# EAGLE board lightclock.0 (EAGLE 6.2)
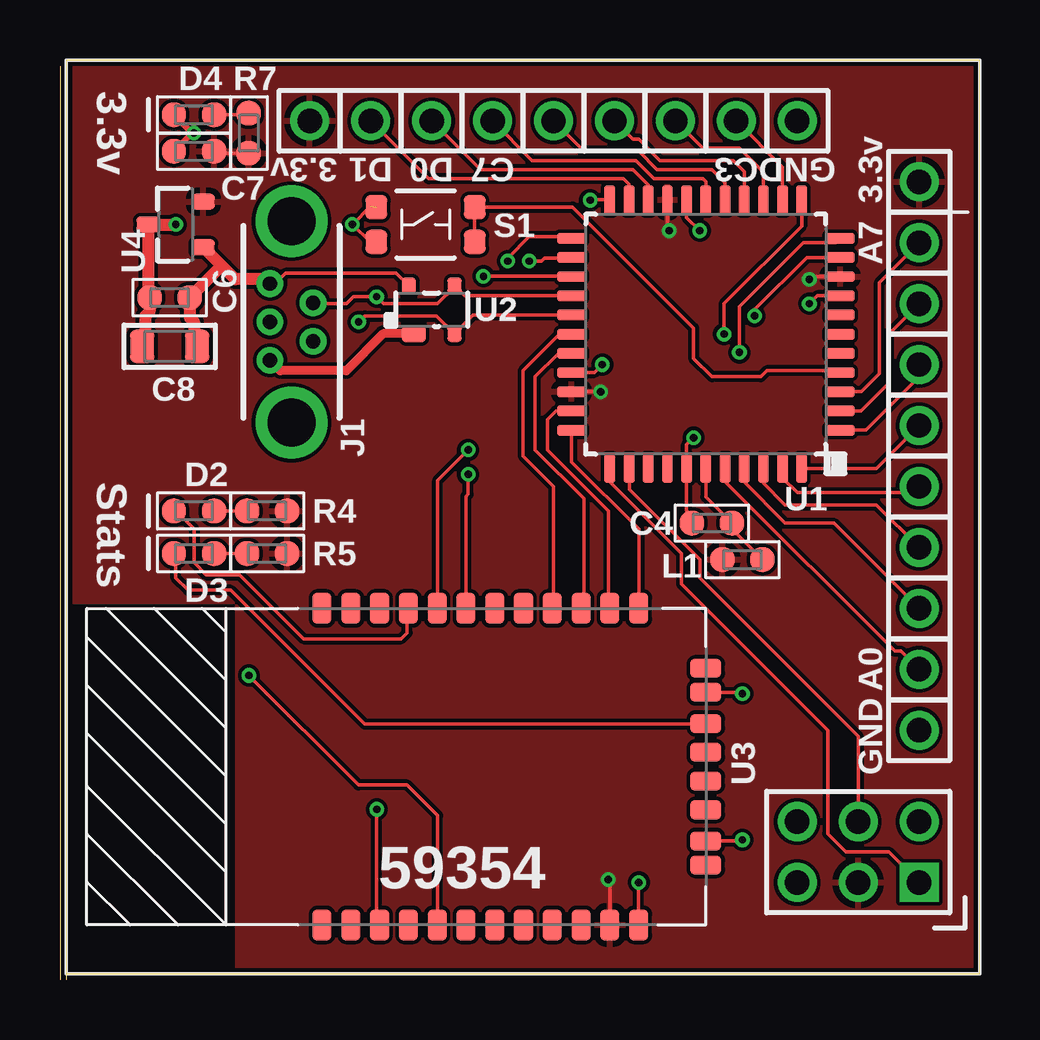
[diagram p0: board, top side]
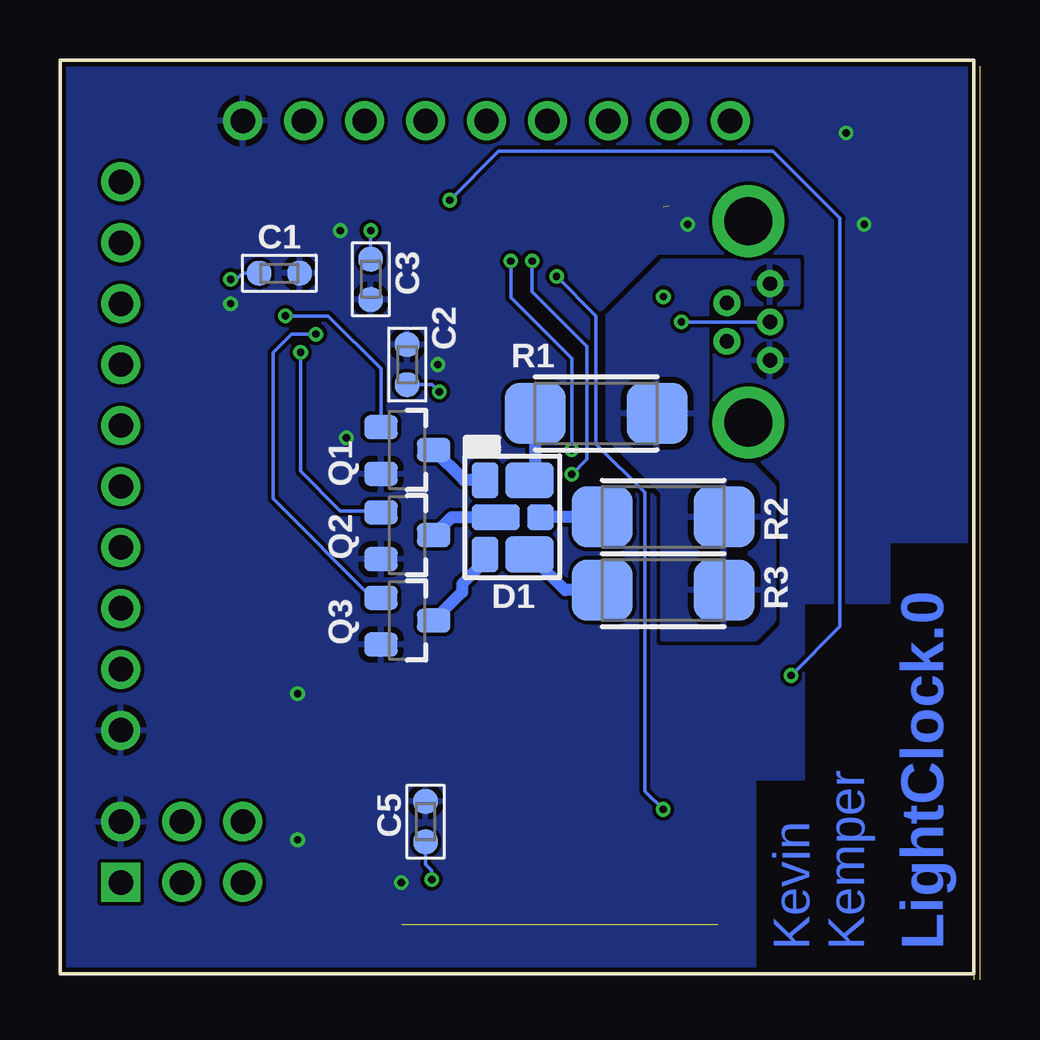
[diagram p1: board, bottom side, seen from below]

Size 38.35 x 38.35 mm. Coordinates in mm from the lower left corner, seen from the top.
Outline: 0.25,0.25 38.35,0.25 38.35,38.35 0.25,38.35 0.25,0.25
Outline: 0,38.1 0,0
Outline: 0.25,0.25 0.25,0
Copper layers (1*16): Top 0.035mm / dielectric 1.5mm / Bottom 0.035mm
Design rules: minimum track width 6mil, minimum drill 12mil, track to track 6mil, track to pad 6mil, pad to pad 6mil, via to via 6mil, smd to smd 0mil, copper to edge 10mil, drill to drill 10mil, minimum pad ring 10mil, minimum via ring 6mil, stop-mask expansion 2mil, vias tented up to drill 100mil, thermal gap 10mil

## Footprints (pad centres in the part's own frame; a part is rotated, then mirrored left to right if it is on the bottom)
0603 = smd 1.016 x 1.016: 1 0,0.838; 2 0,-0.838
0805 = smd 1.016 x 1.397: 1 -1.143,0; 2 1.143,0
LRTDC9TP-EAFB-GHQN = smd 2 x 1.5: A1 -0.524,-1.536; A3 -0.524,1.564 | smd 1.1 x 1.1: A2 -0.974,0.014 | smd 1.1 x 1.5: C1 1.326,-1.536; C3 1.326,1.564 | smd 2 x 1.1: C2 0.876,0.014
0603-POL = smd 1.016 x 1.016: 1 0,0.838; 2 0,-0.838
651005136421 = drill 0.6 pad 1.016: 1 0.9,-1.6; 2 -0.9,-0.8; 3 0.9,0; 4 -0.9,0.8; 5 0.9,1.6 | drill 2: 6 0,4.2; 7 0,-4.2
HEADER-1X1 = drill 1.016 pad 1.626: 1 0,0
HEADER-2X6 = drill 1.016 pad 1.626 square: 1 0,0 | drill 1.016 pad 1.626: 2 2.54,0; 3 5.08,0; 4 5.08,-2.54; 5 2.54,-2.54; 6 0,-2.54
SOT-23 = smd 1 x 1.4: 1 -0.95,-1.1; 2 1,-1.1; 3 0,1.1
2010 = smd 2.54 x 2.54: 1 -2.54,0; 2 2.54,0
KMR211GLFS = smd 0.9 x 1: 1 -2.05,-0.725; 2 -2.05,0.725; 3 2.05,-0.725; 4 2.05,0.725
ATXMEGA16A4U-AUR = smd 1.2 x 0.45: 1 -5.6,4; 2 -5.6,3.2; 3 -5.6,2.4; 4 -5.6,1.6; 5 -5.6,0.8; 6 -5.6,0; 7 -5.6,-0.8; 8 -5.6,-1.6; 9 -5.6,-2.4; 10 -5.6,-3.2; 11 -5.6,-4; 23 5.6,-4; 24 5.6,-3.2; 25 5.6,-2.4; 26 5.6,-1.6; 27 5.6,-0.8; 28 5.6,0; 29 5.6,0.8; 30 5.6,1.6; 31 5.6,2.4; 32 5.6,3.2; 33 5.6,4 | smd 0.45 x 1.2: 12 -4,-5.6; 13 -3.2,-5.6; 14 -2.4,-5.6; 15 -1.6,-5.6; 16 -0.8,-5.6; 17 0,-5.6; 18 0.8,-5.6; 19 1.6,-5.6; 20 2.4,-5.6; 21 3.2,-5.6; 22 4,-5.6; 34 4,5.6; 35 3.2,5.6; 36 2.4,5.6; 37 1.6,5.6; 38 0.8,5.6; 39 0,5.6; 40 -0.8,5.6; 41 -1.6,5.6; 42 -2.4,5.6; 43 -3.2,5.6; 44 -4,5.6
PRTR5V0U2X = smd 1 x 0.7: 1 -0.75,-1 | smd 0.6 x 0.7: 2 0.95,-1; 3 0.95,1; 4 -0.95,1
RN-42 = smd 1.3 x 0.8: 1 -13.2,16; 2 -13.2,14.8; 3 -13.2,13.6; 4 -13.2,12.4; 5 -13.2,11.2; 6 -13.2,10; 7 -13.2,8.8; 8 -13.2,7.6; 9 -13.2,6.4; 10 -13.2,5.2; 11 -13.2,4; 12 -13.2,2.8; 13 0,2.8; 14 0,4; 15 0,5.2; 16 0,6.4; 17 0,7.6; 18 0,8.8; 19 0,10; 20 0,11.2; 21 0,12.4; 22 0,13.6; 23 0,14.8; 24 0,16 | smd 0.8 x 1.3: 28 -3.5,0; 29 -9.7,0; 30 -2.5,0; 31 -4.8,0; 32 -6,0; 33 -7.2,0; 34 -8.4,0; 35 -10.7,0
AP7313-33SAG-7 = smd 0.65 x 0.95: 1 -0.95,-1.15; 2 0.95,-1.15; 3 0,1.15

## Placement (x,y rotation side)
C1  0.1 uF  [0603]  29.21,29.46 90 bottom
C2  0.1 uF  [0603]  23.88,25.65 180 bottom
C3  0.1 uF  [0603]  25.4,29.21 0 bottom
C4  0.1 uF  [0603]  27.18,19.05 270 top
C5  0.1 uF  [0603]  23.11,6.6 180 bottom
C6  1 uF  [0603]  4.57,28.45 270 top
C7  1 uF  [0603]  5.59,34.54 270 top
C8  10 uF  [0805]  4.57,26.42 180 top
D1  LED-LRTDC9TP  [LRTDC9TP-EAFB-GHQN]  19.3,19.3 180 bottom
D2  LED  [0603-POL]  5.59,19.56 270 top
D3  LED  [0603-POL]  5.59,17.78 270 top
D4  LED  [0603-POL]  5.59,36.07 270 top
J1  USB-MINI-651005136421  [651005136421]  9.65,27.43 180 top
J2  TESTPAD  [HEADER-1X1]  28.19,35.81 0 top
J3  TESTPAD  [HEADER-1X1]  25.65,35.81 0 top
J4  TESTPAD  [HEADER-1X1]  23.11,35.81 0 top
J5  TESTPAD  [HEADER-1X1]  20.57,35.81 0 top
J6  TESTPAD  [HEADER-1X1]  18.03,35.81 0 top
J7  TESTPAD  [HEADER-1X1]  15.49,35.81 0 top
J8  TESTPAD  [HEADER-1X1]  12.95,35.81 0 top
J9  HEADER-2X6  [HEADER-2X6]  35.81,4.06 180 top
J10  TESTPAD  [HEADER-1X1]  35.81,12.95 0 top
J11  TESTPAD  [HEADER-1X1]  35.81,15.49 0 top
J12  TESTPAD  [HEADER-1X1]  35.81,18.03 0 top
J13  TESTPAD  [HEADER-1X1]  35.81,20.57 0 top
J14  TESTPAD  [HEADER-1X1]  35.81,23.11 0 top
J15  TESTPAD  [HEADER-1X1]  35.81,25.65 0 top
J16  TESTPAD  [HEADER-1X1]  35.81,28.19 0 top
J17  TESTPAD  [HEADER-1X1]  35.81,30.73 0 top
J18  TESTPAD  [HEADER-1X1]  35.81,33.27 0 top
J19  TESTPAD  [HEADER-1X1]  30.73,35.81 0 top
J20  TESTPAD  [HEADER-1X1]  10.41,35.81 0 top
J21  TESTPAD  [HEADER-1X1]  35.81,10.41 0 top
L1  [0603]  28.45,17.53 90 top
Q1  BSS138  [SOT-23]  23.88,22.1 270 bottom
Q2  BSS138  [SOT-23]  23.88,18.54 270 bottom
Q3  BSS138  [SOT-23]  23.88,14.99 270 bottom
R1  18  [2010]  16,23.62 0 bottom
R2  9R1  [2010]  13.21,19.3 0 bottom
R3  13  [2010]  13.21,16.26 0 bottom
R4  750  [0603]  8.64,19.56 90 top
R5  750  [0603]  8.64,17.78 90 top
R7  750  [0603]  7.87,35.31 0 top
S1  KMR211GLFS  [KMR211GLFS]  15.24,31.5 0 top
U1  ATXMEGA-A4U  [ATXMEGA16A4U-AUR]  26.92,26.92 180 top
U2  DIODE-ESD-PRTR5V0U2X  [PRTR5V0U2X]  15.49,27.94 0 top
U3  RN-42  [RN-42]  26.92,15.49 90 top
U4  AP7313-33SAG-7  [AP7313-33SAG-7]  4.83,31.5 90 top

## Library data of the parts
C1-C8 D2-D4 L1 Q1-Q3 R1-R5 R7 = Kemper-Passives
D1 = Kemper-Passives; DIGIKEY: 475-2856-1-ND
J1 = Kemper-Connectors; DIGIKEY: 732-2735-ND
J2-J21 = Kemper-Connectors
S1 = Kemper-ElectroMechanical
U1 = Kemper-DigitalIC; DIGIKEY: ATXMEGA16A4U-AURCT-ND
U2 = Kemper-Passives; DIGIKEY: 568-4140-1-ND
U3 = Kemper-DigitalIC; SPARKFUN: WRL-10253
U4 = Kemper-DigitalIC

## Nets
+3V3: C1.1 C2.1 C3.1 C5.1 C7.1 J9.2 J18.1 J20.1 L1.1 R4.2 R5.2 R7.2 U1.9 U1.19 U1.31 U3.11 U4.2
+5V: C6.1 C8.1 J1.1 R1.2 R2.2 R3.2 U2.4 U4.1
BT_AUTO_DISC: U1.24 U3.20
BT_AUTO_MASTER: U1.25 U3.3
BT_CTS: U1.28 U3.16
BT_RESET: U1.22 U3.5
BT_RTS: U1.29 U3.15
BT_RX: U1.33 U3.13
BT_STATUS: U1.23 U3.19
BT_STATUS_LED: D2.2 U3.21
BT_TX: U1.32 U3.14
BT_TX/RX_STATUS_LED: D3.2 U3.31
D+: J1.3 U1.27 U2.2
D-: J1.2 U1.26 U2.3
GND: C1.2 C2.2 C3.2 C4.2 C5.2 C6.2 C7.2 C8.2 D4.2 J1.5 J9.6 J19.1 J21.1 Q1.2 Q2.2 Q3.2 S1.1 S1.2 U1.8 U1.18 U1.30 U1.38 U2.1 U3.1 U3.4 U3.12 U3.28 U3.29 U4.3
N$1: C4.1 L1.2 U1.39
N$2: D2.1 R4.1
N$3: D1.A1 R1.1
N$4: D1.A2 R2.1
N$5: D1.A3 R3.1
N$6: D3.1 R5.1
N$7: D1.C1 Q1.3
N$8: D1.C2 Q2.3
N$9: D1.C3 Q3.3
N$10: D4.1 R7.1
N$11: J7.1 U1.20
N$13: J8.1 U1.21
N$14: J6.1 U1.17
N$15: J5.1 U1.16
N$16: J4.1 U1.15
N$17: J3.1 U1.14
N$18: J2.1 U1.13
N$20: J10.1 U1.40
N$21: J11.1 U1.41
N$22: J12.1 U1.42
N$23: J13.1 U1.43
N$24: J14.1 U1.44
N$25: J15.1 U1.1
N$26: J16.1 U1.2
N$27: J17.1 U1.3
PDI_CLK: J9.5 U1.35
PDI_DATA: J9.1 U1.34
PWM_B: Q3.1 U1.12
PWM_G: Q2.1 U1.11
PWM_R: Q1.1 U1.10
SWITCH: S1.3 S1.4 U1.4

## Tracks (layer width: path | path; a pad name or v marks a point on that pad's centre or on a via)
+3V3  (via drill 0.3)
  Top 0.152: U1.31 v22.54,24.52 | C7.1 6.5,34.47 R7.2 | v31.24,29.21 31.36,29.32 U1.9 | v25.4,31.24 25.32,31.32 U1.19 | v22.86,4.19 22.92,4.13 U3.11
  Bottom 0.152: C2.1 22.83,24.82 v22.54,24.52 | C1.1 30.73,29.46 30.99,29.21 v31.24,29.21 | C3.1 v25.4,31.24 | C5.1 23.11,4.83 22.86,4.57 v22.86,4.19
  pour Top (rank 2): 0.51,38.1 38.1,38.1 38.1,0.51 7.37,0.51 7.37,15.75 0.51,15.75
+5V
  Top 0.152: U2.4 14.02,29.46 9.4,29.46 8.97,29.03 J1.1
  Top 0.508: C8.1 5.59,26.54 5.59,27.43 5.41,27.61 C6.1 6.65,29.69 6.83,29.69 | J1.1 8.57,29.21 7.31,29.21 6.83,29.69 | U4.1 6.83,29.69
  pour Bottom: 7.62,29.97 7.62,28.19 11.43,28.19 11.43,23.37 8.64,20.57 8.64,14.99 9.4,14.22 13.21,14.22 13.21,20.32 15.49,22.61 15.49,27.69 13.21,29.97
BT_AUTO_DISC  (via drill 0.3)
  Top 0.152: U3.20 15.75,15.52 15.75,20.83 v17.02,22.1 | U1.24 21.17,29.97 21.05,30.1 20.19,30.1 20.07,29.97 v19.56,29.97
  Bottom 0.152: v17.02,22.1 17.02,25.91 19.56,28.45 v19.56,29.97
BT_AUTO_MASTER  (via drill 0.3)
  Top 0.152: U3.3 13.21,2.41 v13.21,7.11 | U1.25 21.31,29.34 v17.65,29.34
  Bottom 0.152: v13.21,7.11 13.97,7.87 13.97,20.32 16,22.35 16,27.69 v17.65,29.34
BT_CTS
  Top 0.152: U1.28 20.83,26.92 19.3,25.4 19.3,21.84 20.57,20.57 20.57,15.54 U3.16
BT_RESET  (via drill 0.3)
  Top 0.152: U3.5 15.75,2.32 15.75,6.86 14.48,8.13 12.45,8.13 v7.87,12.7 | U1.22 22.11,32.52 v22.1,32.51
  Bottom 0.152: v7.87,12.7 5.84,14.73 5.84,31.75 8.64,34.54 20.07,34.54 v22.1,32.51
BT_RTS
  Top 0.152: U1.29 20.79,26.12 19.81,25.15 19.81,22.1 21.84,20.07 21.84,15.61 U3.15
BT_RX
  Top 0.152: U1.33 21.32,21.6 24.13,18.8 U3.13
BT_STATUS  (via drill 0.3)
  Top 0.152: U3.19 16.92,20.16 17.02,20.25 v17.02,21.08 | U1.23 21.26,30.99 19.56,30.99 18.67,30.1 v18.67,29.97
  Bottom 0.152: v17.02,21.08 16.38,21.72 16.38,26.42 18.67,28.7 v18.67,29.97
BT_STATUS_LED
  Top 0.152: D2.2 4.83,19.56 5.59,18.8 5.59,17.4 6.1,16.89 7.49,16.89 10.16,14.22 14.22,14.22 14.48,14.48 14.48,15.45 U3.21
BT_TX
  Top 0.152: U1.32 20.68,23.72 20.32,23.37 20.32,22.1 22.86,19.56 22.86,15.56 U3.14
BT_TX/RX_STATUS_LED
  Top 0.152: 4.83,17.78 D3.2 4.83,17.7 4.83,16.76 5.33,16.26 7.11,16.26 12.7,10.67 26.9,10.67 U3.31
D+  (via drill 0.3)
  Top 0.152: v12.45,27.43 12.7,27.69 15.7,27.69 U2.2 17.23,27.72 U1.27
  Bottom 0.152: J1.3 v12.45,27.43
D-  (via drill 0.3)
  Top 0.152: U1.26 16.86,28.52 U2.3 16.44,28.89 15.75,28.19 13.49,28.19 v13.2,28.49 12.23,28.49 11.94,28.19 10.59,28.19 J1.2
GND  (via drill 0.3)  (3 unrouted)
  Top 0.152: C4.2 26.12,19.6 U1.38 26.12,22.31 v26.42,22.61 | U1.30 22.28,25.32 v22.61,25.65 | U1.8 31.57,28.52 v31.24,28.19 | U3.28 28.39,11.99 v28.45,11.94 | U3.12 v24.12,4.06 v24.13,4.06 | U3.29 28.4,5.79 v28.45,5.84 | 13.48,32.26 12.95,32.26 v12.19,31.5 12.92,30.77 S1.1 | U1.18 26.12,31.79 v26.67,31.24
  Top 0.254: C7.2 5.51,35.31 | D4.2 5.51,35.31 | 5.51,35.31 v5.59,35.31
  Top 0.381: U2.1 13.48,26.94 11.94,25.4 9.18,25.4 J1.5
  Top 0.508: C8.2 3.56,26.54 3.56,27.69 3.73,27.86 C6.2 3.68,28.51 U4.3 v4.83,31.5
  pour Bottom (rank 2): 0.51,38.1 38.1,38.1 38.1,0.51 9.4,0.51 9.4,8.38 7.37,8.38 7.37,15.75 3.81,15.75 3.81,18.29 0.51,18.29
N$1
  Top 0.152: U1.39 26.92,20.14 C4.1 28.02,18.8 L1.2
N$2
  Top 0.152: D2.1 R4.1
N$3
  Bottom 0.508: R1.1 18.54,21.08 D1.A1
N$4
  Bottom 0.508: R2.1 18.32,19.3 D1.A2
N$5
  Bottom 0.508: R3.1 17.3,16.26 D1.A3
N$6
  Top 0.152: D3.1 R5.1
N$7
  Bottom 0.508: D1.C1 21.52,20.84 Q1.3
N$8
  Bottom 0.508: D1.C2 22.03,19.29 Q2.3
N$9
  Bottom 0.508: D1.C3 20.63,17.47 21.59,16.51 21.59,16.17 Q3.3
N$10
  Top 0.152: R7.1 7.8,36.07 D4.1
N$11
  Top 0.152: U1.20 24.52,33.13 23.88,33.78 17.53,33.78 J7.1
N$13
  Top 0.152: U1.21 23.72,33.17 23.5,33.4 15.37,33.4 J8.1
N$14
  Top 0.152: U1.17 26.92,33.27 26.8,33.4 24.77,33.4 24,34.16 19.69,34.16 J6.1
N$15
  Top 0.152: U1.16 27.72,33.24 27.18,33.78 24.89,33.78 24.13,34.54 21.84,34.54 J5.1
N$16
  Top 0.152: U1.15 28.52,33.71 28.07,34.16 25.02,34.16 24.13,35.05 23.88,35.05 J4.1
N$17
  Top 0.152: U1.14 29.32,33.67 28.32,34.67 26.8,34.67 J3.1
N$18
  Top 0.152: U1.13 30.12,33.88 J2.1
N$20
  Top 0.152: U1.40 27.72,20.79 34.8,13.72 35.05,13.72 J10.1
N$21
  Top 0.152: U1.41 28.52,20.75 30.23,19.05 32.26,19.05 J11.1
N$22
  Top 0.152: U1.42 29.32,20.71 30.23,19.81 34.04,19.81 J12.1
N$23
  Top 0.152: U1.43 30.12,20.93 30.73,20.32 35.56,20.32 J13.1
N$24
  Top 0.152: U1.44 34.02,21.32 J14.1
N$25
  Top 0.152: U1.1 33.59,22.92 35.81,25.15 J15.1
N$26
  Top 0.152: U1.2 33.38,23.72 34.54,24.89 34.54,26.92 J16.1
N$27
  Top 0.152: U1.3 33.41,24.52 34.16,25.27 34.16,29.08 J17.1
PDI_CLK
  Top 0.152: U1.35 23.75,21.3 23.75,20.45 26.67,17.53 26.67,16.76 33.27,10.16 J9.5
PDI_DATA
  Top 0.152: U1.34 22.86,21.26 22.86,20.83 25.91,17.78 25.91,16.51 32,10.41 32,6.1 32.77,5.33 34.54,5.33 J9.1
PWM_B  (via drill 0.3)
  Top 0.152: U1.12 30.92,31.43 27.69,28.19 v27.69,26.92
  Bottom 0.152: Q3.1 25.33,15.94 29.46,20.07 29.46,26.16 28.7,26.92 v27.69,26.92
PWM_G  (via drill 0.3)
  Top 0.152: U1.11 32.33,30.73 30.99,30.73 28.32,28.07 v28.32,26.16
  Bottom 0.152: Q2.1 25.04,19.56 26.67,19.56 28.32,21.21 v28.32,26.16
PWM_R  (via drill 0.3)
  Top 0.152: U1.10 31.14,30.12 28.96,27.94 v28.96,27.69
  Bottom 0.152: Q1.1 24.98,25.48 27.18,27.69 v28.96,27.69
SWITCH
  Top 0.152: U1.4 32.45,25.4 29.46,25.4 29.21,25.15 27.18,25.15 26.42,25.91 26.42,27.18 21.37,32.22 S1.4 S1.3

## Text on the board
Bottom: LightClock.0 | Kemper | Kevin
tPlace: 3.3v | 3.3v | D1 | D0 | C7 | C3 | GND | 3.3v | A7 | Stats | A0 | GND | 59354
bStop: LightClock.0 | Kemper | Kevin